# Altium PCB BLE_tag_hv2.PcbDoc
Units mm, origin at the board's own origin, x right, y up, seen from the top; angles counter-clockwise.
Board outline 48 x 58 mm, 2 copper layers (Top Layer, Bottom Layer); 33 components, 27 nets, 122 pads, 195 vias.
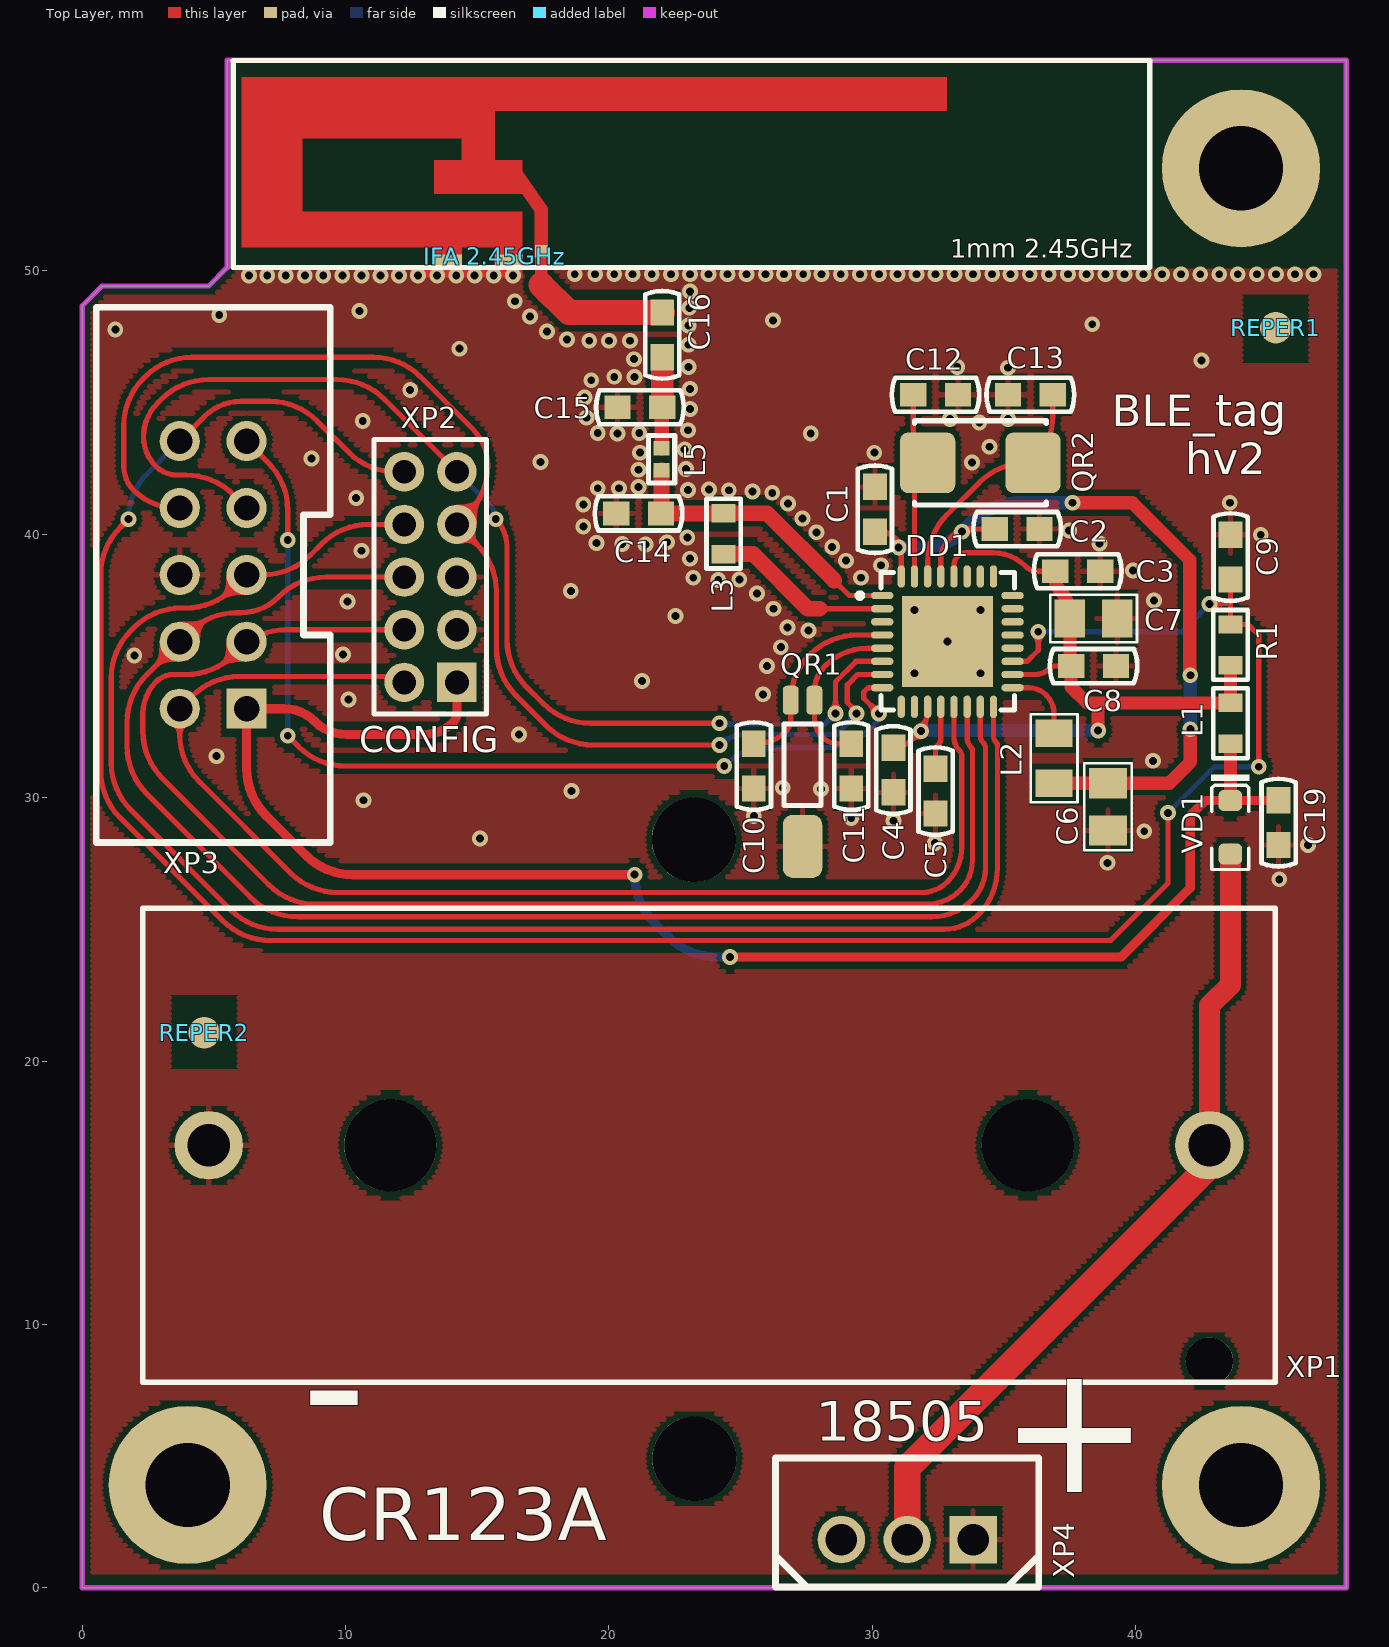
[diagram p0: Top Layer view]
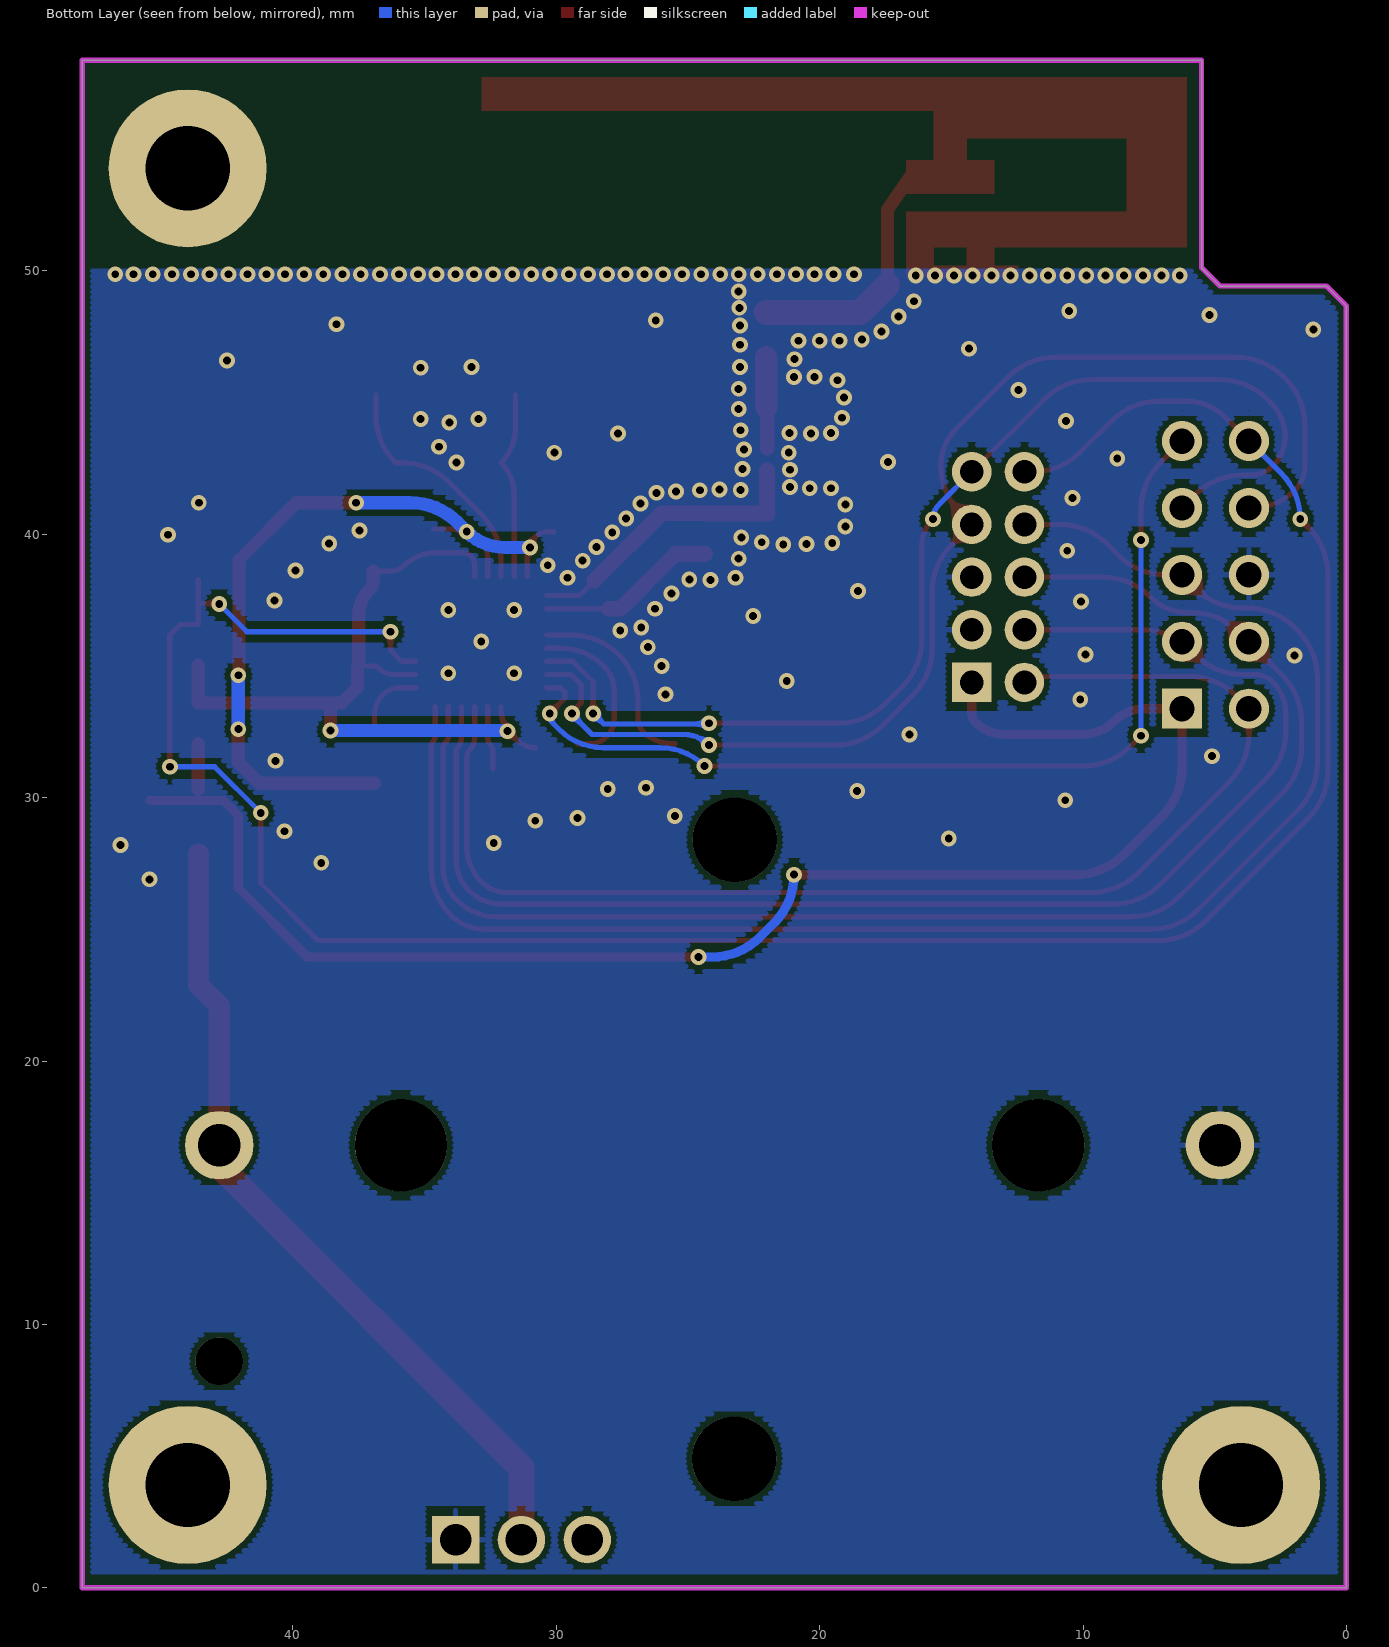
[diagram p1: Bottom Layer view, seen from below]
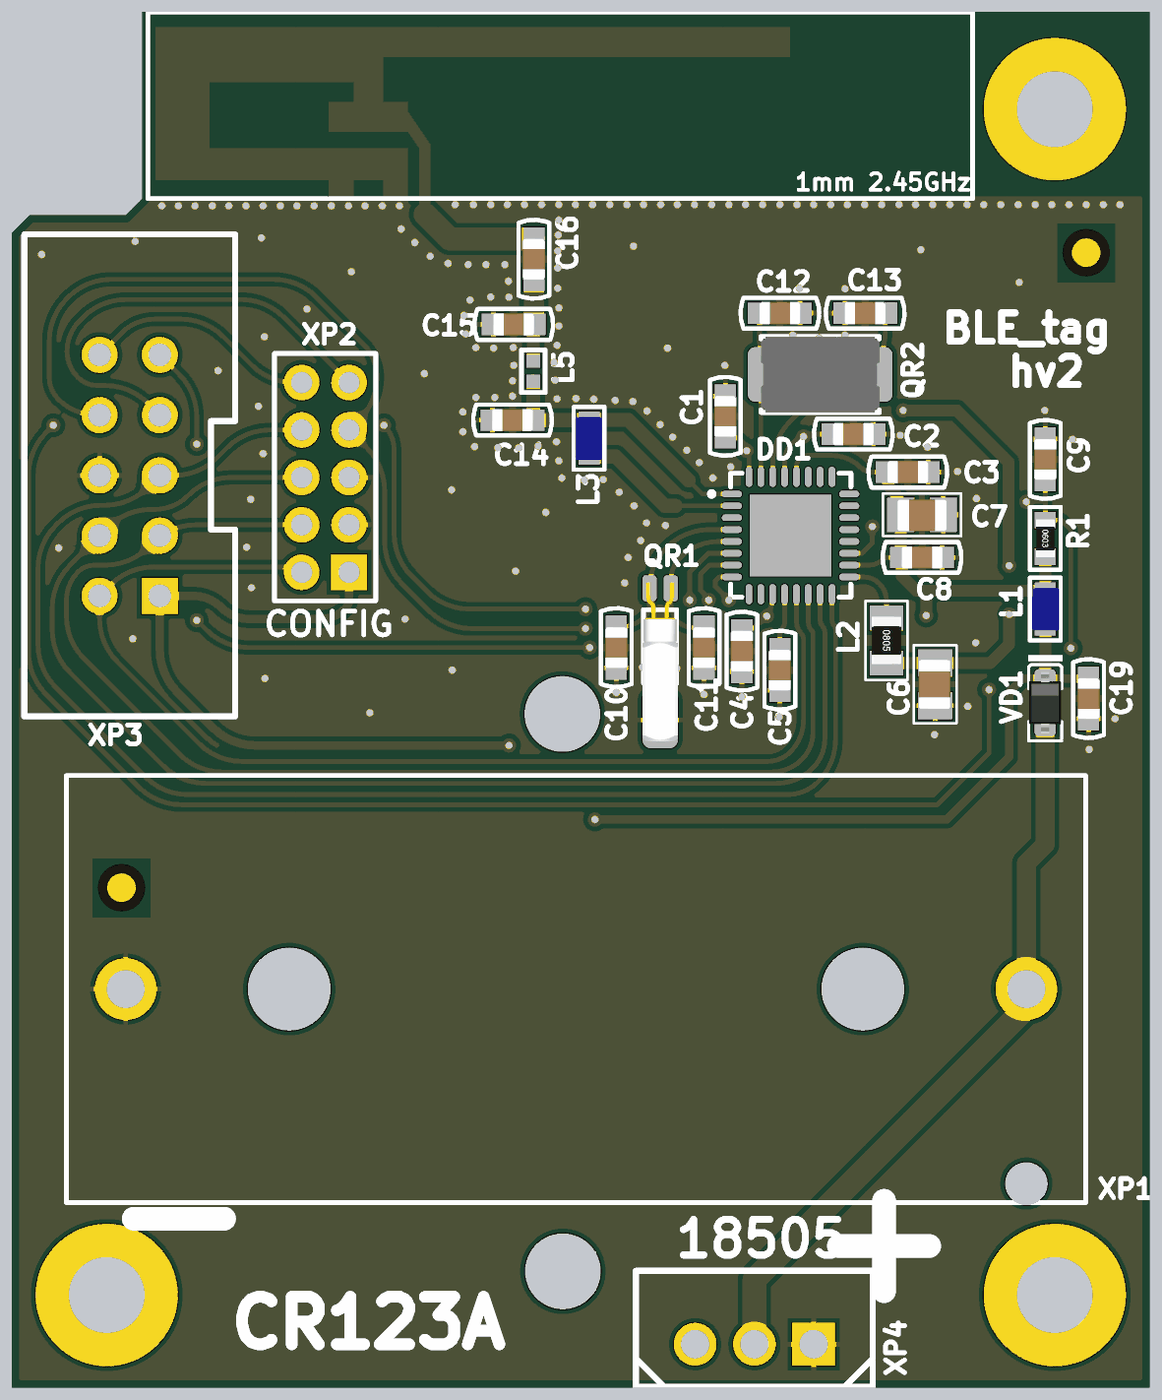
[diagram p2: 3D render of the assembled board from above, using the file's embedded part models]

## Layer stack, top to bottom
Top Solder: solder mask 0.0102, Solder Resist, Dk 3.5
Top Layer: signal copper 0.0356
Dielectric 1: dielectric 0.32, FR-4, Dk 4.8
Bottom Layer: signal copper 0.0356
Bottom Solder: solder mask 0.0102, Solder Resist, Dk 3.5

## Board outline
0,0 0,48.675 0.75,49.425 4.8,49.425 5.5,50.125 5.5,58 48,58 48,0

## Design rules (kind name [scope] priority, off if disabled: settings)
Clearance [All] p1: gap=0.2 ignorepadtopadclearanceinfootprint=FALSE
ComponentClearance [All] p1: gap=0.05 collisioncheckmode=3 verticalgap=2540 showdistances=FALSE
HoleSize [All] p1: absolutevalues=TRUE maxlimit=10 minlimit=0.025 maxpercent=80.000 minpercent=20.000
HoleToHoleClearance [All] p1: gap=0.05 allowstackedmicrovias=TRUE
MinimumSolderMaskSliver [All] p1: minsoldermaskwidth=0.05
PolygonConnect VIA [IsVia] p1: connectstyle=Direct reliefconductorwidth=0.254 reliefentries=4 polygonreliefangle="90 Angle" airgapwidth=0.254
PolygonConnect [All] p2: connectstyle=Relief reliefconductorwidth=0.2 reliefentries=4 polygonreliefangle="90 Angle" airgapwidth=0.2
RoutingVias [All] p1: holewidth=0.4 width=0.8 viastyle="Through Hole" minholewidth=0.3 minwidth=0.6 maxholewidth=0.5 maxwidth=1
ShortCircuit Antenna [InComponent('ANT1')] p1: allowed=TRUE
ShortCircuit [All] p2: allowed=FALSE
SilkToSilkClearance [All] p1: silktosilkclearance=0.05
SilkToSolderMaskClearance [IsPad] p1: minsilkscreentomaskgap=0.05 clearancetoexposedcopper=TRUE
SolderMaskExpansion [All] p1: expansion=0.102
Width [All] p1: maxlimit=3 minlimit=0.2 preferedwidth=0.5
23 further rules are at their usual default settings.

## Classes and differential pairs
component class [5]-CONNECTORS: C19 VD1 XP1 XP2 XP3 XP4
component class [4]-RF: C14 C15 C16 "IFA 2.45GHz" L3 L5 REPER1 REPER2
component class [3]-MCU: C1 C2 C3 C4 C5 C6 C7 C8 C9 C10 C11 C12 C13 DD1 L1 L2 QR1 QR2 R1

## Components (designator, comment, footprint, x,y, rotation, side; value= is the part's Value field where it differs from the comment)
C1 "0.1uF" CC0603 30.1,40.95 r90 top
C2 "0.1uF" CC0603 35.5,40.2 r0 top
C3 "0.1uF" CC0603 37.8,38.6 r180 top
C4 "0.1uF" CC0603 30.8,31.05 r90 top
C5 "1uF" CC0603 32.4,30.25 r270 top
C6 "10uF" CC0805 38.95,29.65 r90 top
C7 "10uF" CC0805 38.4,36.8 r180 top
C8 "0.1uF" CC0603 38.4,35 r180 top
C9 "0.1uF" CC0603 43.6,39.134 r270 top
C10 "15pF" CC0603 25.5,31.2 r270 top
C11 "15pF" CC0603 29.2,31.2 r270 top
C12 "22pF" CC0603 32.4,45.298 r0 top
C13 "22pF" CC0603 36,45.3 r180 top
C14 "1.2pF" CC0603 21.122,40.79 r0 top
C15 "1.2pF" CC0603 21.172,44.825 r0 top
C16 "12pF" CC0603 22.025,47.575 r90 top
C19 "0.1uF" CC0603 45.425,29.05 r90 top
DD1 "CC2650" QFN32_TI 30.375,37.675 r0 top
"IFA 2.45GHz" "ANTENNA_IFA_245_1MM" IFA245_1mm 13.331,44.294 r0 top value="IFA 2.45GHz" (schematic designator =Value)
L1 "BLM18HE152SN1" L0603 43.6,32.825 r90 top
L2 "10uH" RC0805 36.9,31.5 r270 top
L3 "L0603" L0603 24.35,40.025 r270 top value=15nH
L5 "2nH" L0402 21.997,42.85 r90 top
QR1 "MS3V-T1R" MS3V-T1R 27.8,33.7 r270 top
QR2 "SJK-6L-24.0" AC5032_2 34.1,42.715 r0 top
R1 "100k" RC0603 43.6,35.8 r270 top
REPER1 "REPER1.2" REPER1.2 45.325,47.85 r90 top
REPER2 "REPER1.2" REPER1.2 4.625,21.075 r90 top
VD1 "PMEG1020EJ" SOD323 43.593,28.875 r90 top
XP1 "BHC-CR123A" CR123_HOLDER 42.8,16.8 r180 top locked
XP2 "PLD2-10" PLD2-10 14.2,34.375 r180 top
XP3 "BH-10" BH-10 6.24,33.38 r90 top locked
XP4 "MW03D" MW03D 33.825,1.825 r180 top

## Footprints (in the part's own frame and the unit in brackets; to place one, negate y for a bottom-side part, rotate by r counter-clockwise, add the part's x,y. Pads: shape width x height; smd on the part's side, far side on the other; paste and mask are expansions set on the pad)
AC5032_2 [mm]
  rrect30% 2.1x2.3 smd mask+0.05: 1(-2,0) 2(2,0)
  silkscreen extent -2.5,-1.6 2.5,1.6, body extent -2.5,-1.6 2.5,1.6, height 1.2
BH-10 [mil] "Connector; Header; 5x2 Position"
  rect 60x60 hole 38 mask+1.97: 1(0,0)
  round 60 hole 38 mask+1.97: 2(0,100) 3(100,0) 4(100,100) 5(200,0) 6(200,100) 7(300,0) 8(300,100) 9(400,0) 10(400,100)
  silkscreen extent -200,-125 600,225
CC0603 [mm]
  rect 1x0.9 smd paste-25.4 mask+0.05: 1(-0.85,0) 2(0.85,0)
  silkscreen extent -1.66,-0.65 1.66,0.65, body extent -0.87,-0.47 0.88,0.48, height 0.85
CC0805 [mm]
  rect 1.15x1.45 smd paste-25.4 mask+0.05: 1(-0.9,0) 2(0.9,0)
  silkscreen extent -1.65,-0.9 1.65,0.9, body extent -1.05,-0.65 1.05,0.7, height 1.1
CR123_HOLDER [mm]
  round 1.8 hole 1.8 unplated mask+0.05: 0(0,8.2)
  round 3.5 hole 3.5 unplated mask+0.05: 0(6.9,0) 0(31.1,0)
  round 2.6 hole 1.6 mask+0.05: 1(0,0) 2(38,0)
  silkscreen extent -2.5,-9 40.5,9, body extent -2.5,-9 40.5,9, height 14
IFA245_1mm [mm]
  rect 0.48x0.48 smd paste-2 mask+0.05: 1(4.094,6.459)
  rect 1.046x0.5 smd paste-2 mask+0.05: 2(0.558,6.081) 2(2.86,6.081)
  Top Layer region: 19.497,13.06 19.496,13.061 -7.268,13.061 -7.268,6.606 0.035,6.606 0.035,5.831 1.081,5.831 1.081,6.605 2.337,6.605 2.337,5.831 3.383,5.831 3.383,7.955 3.382,7.956 -4.987,7.956 -4.987,10.748 -4.986,10.749 1.082,10.749 1.081,10.748 1.081,9.912 0.035,9.912 0.035,8.647 3.38,8.647 3.382,8.645 3.854,7.956 3.854,6.22 4.335,6.219 4.335,8.104 3.383,9.502 3.383,9.911 2.338,9.912 2.336,9.912 2.337,11.097 2.337,11.795 19.496,11.796
  silkscreen extent -7.6,5.83 27.2,13.7
L0402 [mm]
  rect 0.55x0.6 smd mask+0.05: 1(-0.425,0) 2(0.425,0)
  silkscreen extent -0.9,-0.5 0.9,0.5
L0603 [mm]
  rect 0.7x0.9 smd paste-25.4 mask+0.05: 1(-0.775,0) 2(0.774,0)
  silkscreen extent -1.32,-0.65 1.33,0.65, body extent -0.9,-0.58 0.9,0.54, height 1
MS3V-T1R [mm]
  rrect50% 1.1x0.6 smd mask+0.05: 1(0,0) 2(0,-0.9)
  rrect50% 2.4x1.5 smd mask+0.05: 3(5.55,-0.45)
  silkscreen extent 0.9,-1.15 4,0.25, body extent -0.25,-1.19 6.45,0.29, height 1.48
MW03D [mm]
  rect 1.8x1.8 hole 1.2 mask+0.05: 1(0,0)
  round 1.8 hole 1.2 mask+0.05: 2(2.5,0) 3(5,0)
  silkscreen extent -2.5,-3.1 7.5,1.8
PLD2-10 [mm]
  rect 1.5x1.5 hole 0.9 mask+0.05: 1(-0.025,0)
  round 1.5 hole 0.9 mask+0.05: 2(1.975,0) 3(-0.025,-2) 4(1.975,-2) 5(-0.025,-4) 6(1.975,-4) 7(-0.025,-6) 8(1.975,-6) 9(-0.025,-8) 10(1.975,-8)
  silkscreen extent -1.15,-9.23 3.13,1.2
QFN32_TI [mm]
  oval 0.85x0.28 smd mask+0.05: 1(0,0) 2(0,-0.5) 3(0,-1) 4(0,-1.5) 5(0,-2) 6(0,-2.5) 7(0,-3) 8(0,-3.5) 17(4.95,-3.5) 18(4.95,-3) 19(4.95,-2.5) 20(4.95,-2) 21(4.95,-1.5) 22(4.95,-1) 23(4.95,-0.5) 24(4.95,0)
  oval 0.28x0.85 smd mask+0.05: 9(0.725,-4.225) 10(1.225,-4.225) 11(1.725,-4.225) 12(2.225,-4.225) 13(2.725,-4.225) 14(3.225,-4.225) 15(3.725,-4.225) 16(4.225,-4.225) 25(4.225,0.725) 26(3.725,0.725) 27(3.225,0.725) 28(2.725,0.725) 29(2.225,0.725) 30(1.725,0.725) 31(1.225,0.725) 32(0.725,0.725)
  rect 3.45x3.45 smd mask+0.05: 33(2.475,-1.75)
  silkscreen extent -0.95,-4.35 5.02,0.87
RC0603 [mm]
  rect 0.7x0.9 smd paste-25.4 mask+0.05: 1(-0.775,0) 2(0.774,0)
  silkscreen extent -1.32,-0.65 1.33,0.65, body extent -0.8,-0.4 0.8,0.4, height 0.45
RC0805 [mm]
  rect 1.05x1.4 smd paste-25.4 mask+0.05: 1(-0.95,0) 2(0.95,0)
  silkscreen extent -1.67,-0.89 1.67,0.89, body extent -1,-0.62 1,0.63, height 0.6
REPER1.2 [mm]
  round 1.2 smd paste-25.4 mask+0.05: 1(0,0)
  Top Layer pour cut-out: -1.35,-1.325 1.325,-1.325 1.325,1.325 -1.35,1.325
SOD323 [mm]
  rrect50% 0.8x0.9 smd mask+0.05: 1(-1.016,0) 2(1.016,0)
  silkscreen extent -1.6,-0.74 2,0.72, body extent -1.3,-0.67 1.3,0.67, height 1.1

## Part data
C1 C2 C3 C4 C5 C8 C9 C10 C11 C12 C13 C14 C15 C16 C19: library part CC0603, "CC0603"
C6 C7: library part CC0805, "CC0805"
DD1: library part CC2650RHB, "CC2650RHBT"
"IFA 2.45GHz": "Antenna 2.45GHz"
L1: library part L0603, "L0603"
L2: library part L0805, "L0805"
L5: library part L0402, "L0402"
QR1: "CRYSTAL_32768 Hz"
QR2: library part AC5032_2, "AC5032/2"
R1: library part RC0603, "RC0603"
VD1: library part PMEG2010
XP1: "Holder for CR123 battery"

## Free pads (board coordinates)
  round 6 hole 3.2 unplated mask+0.05: 0(4,3.9) 0(44,3.9) 0(44,53.9)
  round 3.2 hole 3.2 unplated mask+0.05: 0(23.225,28.4) 0(23.246,4.9)

## Via types
v1: diameter 0.6, hole 0.3, Top Layer to Bottom Layer, tented both sides, 195 vias

## Nets (pads, with @x,y where several pads share a name; then routed paths per layer and width w, separated by ;. In a path a pad name is that pad's centre, name@x,y a point inside that pad or via, vN(x,y) a via of type N, cw(c..) or ccw(c..) an arc to the next point about the centre after c; other vN are vias at no path point)
+3V: C19.2 L1.1 VD1.2 XP2.1 XP3.1 | length 60.8
  Top Layer w0.35: XP2.1 14.225,33.212 cw(c13.713,33.212) 14.075,32.85 cw(c12.989,33.936) 12.989,32.4 10.032,32.4 cw(c10.032,34.107) 8.825,32.9 ccw(c7.666,31.741) 7.666,33.38 XP3.1 6.24,31.112 ccw(c8.78,31.112) 6.984,29.316 8.481,27.819 ccw(c10.277,29.615) 10.277,27.075 v1(20.975,27.075) ; v1(24.6,23.95) 39.45,23.95 42.075,26.575 42.075,29.325 42.641,29.891 VD1.2 45.416,29.891 C19.2
  Top Layer w0.5: 43.6,30.307 L1.1
  Bottom Layer w0.35: v1(20.975,27.075) 20.975,27.052 ccw(c23.515,27.052) 21.719,25.256 22.281,24.694 ccw(c24.077,26.49) 24.077,23.95 v1(24.6,23.95)
+3V_F: C3.2 C4.2 C7.2 C8.2 DD1.11 DD1.18 DD1.28 L1.2 R1.2 | length 29.3
  Top Layer w0.2: C4.2 ccw(c30.8,32.866) 31.483,32.183 31.7,32.4 ccw(c30.734,33.366) 32.1,33.366 DD1.11 ; DD1.28 33.1,38.814 cw(c33.612,38.814) 33.25,39.176 cw(c33.55,38.876) 33.55,39.3 34.593,39.3 cw(c34.593,37.593) 35.8,38.8 ccw(c36.283,39.283) 36.283,38.6 C3.2 ; DD1.18 36.176,34.675 ccw(c36.176,35.443) 36.719,34.9 cw(c36.96,34.659) 36.96,35 C8.2
  Top Layer w0.5: C3.2 36.95,38.262 ccw(c37.462,38.262) 37.1,37.9 cw(c36.134,36.934) 37.5,36.934 C7.2 37.5,35.121 ccw(c37.671,35.121) C8.2 37.55,34.2 38.151,33.599 38.6,33.599 ; v1(38.575,32.55) 38.575,33.574 38.6,33.599 ; R1.2 L1.2 38.6,33.599
  Bottom Layer w0.5: v1@31.851,32.55 v1(38.575,32.55)
  other v1: 31.851,32.525
BT_MRDO: DD1.8 XP3.9 | length 37.4
  Top Layer w0.2: XP3.9 7.056,42.724 cw(c5.26,40.928) 7.8,40.928 v1(7.8,39.779) ; v1(7.8,32.35) 8.206,31.944 ccw(c10.002,33.74) 10.002,31.2 v1(24.375,31.2) ; v1(30.249,33.2) 29.675,33.774 29.675,34.009 29.841,34.175 DD1.8
  Bottom Layer w0.2: v1(7.8,32.35) v1(7.8,39.779) ; v1(24.375,31.2) cw(c26.065,29.51) 26.065,31.9 28.225,31.9 ccw(c28.225,34.254) 29.889,32.589 30.071,32.771 ccw(c29.641,33.2) v1(30.249,33.2) ; v1(7.8,39.779) cw(c7.971,39.779) 7.85,39.9 7.8,39.85 v1(7.8,39.779)
BT_RX: DD1.7 XP2.7 XP3.8 | length 48.4
  Top Layer w0.2: XP3.8 3.58,41 cw(c3.58,43.305) 1.95,41.675 cw(c2.855,42.58) 1.575,42.58 1.575,44.123 cw(c4.115,44.123) 2.319,45.919 2.381,45.981 cw(c4.177,44.185) 4.177,46.725 11.048,46.725 cw(c11.048,44.185) 12.844,45.981 14.817,44.008 cw(c13.408,42.6) 15.4,42.6 cw(c12.865,42.6) 14.658,40.808 XP2.7 14.981,39.619 cw(c13.185,37.823) 15.725,37.823 15.725,35.677 ccw(c18.265,35.677) 16.469,33.881 17.606,32.744 ccw(c19.402,34.54) 19.402,32 v1(24.2,32) ; v1(29.4,33.2) 29.447,33.2 29.2,33.447 29.2,33.47 29.05,33.62 29.05,34.284 29.441,34.675 DD1.7
  Bottom Layer w0.2: v1(24.2,32) cw(c25.166,31.034) 25.166,32.4 28.649,32.4 29.4,33.151 v1(29.4,33.2)
BT_TX: DD1.6 XP2.9 XP3.7 | length 44.9
  Top Layer w0.2: XP3.7 5.734,41.506 ccw(c3.938,39.71) 3.938,42.25 3.606,42.25 cw(c3.606,43.412) 2.785,42.59 cw(c3.894,43.7) 2.325,43.7 cw(c4.136,43.7) 2.855,44.98 3.006,45.131 cw(c4.802,43.335) 4.802,45.875 9.673,45.875 cw(c9.673,43.335) 11.469,45.131 XP2.9 ; v1(15.7,40.575) cw(c14.674,39.549) 16.125,39.549 16.125,36.002 ccw(c18.665,36.002) 16.869,34.206 17.507,33.568 ccw(c19.303,35.364) 19.303,32.824 v1(24.2,32.824) ; v1(28.6,33.2) 28.6,34.4 29.375,35.175 DD1.6
  Bottom Layer w0.2: XP3.7@5.834,41.406 XP3.7 ; XP2.9 15.47,41.13 cw(c14.915,40.575) v1(15.7,40.575) ; v1@24.2,32.8 28.2,32.8 v1(28.6,33.2)
GND: "IFA 2.45GHz.2" C1.2 C2.2 C3.1 C4.1 C5.2 C6.1 C7.1 C8.1 C9.1 C10.2 C11.2 C12.2 C13.2 C14.1 C15.1 C19.1 DD1.33 QR1.3 XP1.2 XP2.3 XP2.5 XP3.6 XP4.1
  other v1: 45.45,26.9 38.925,27.525 46.546,28.2 32.375,28.275 15.1,28.45 40.325,28.725 30.8,29.125 29.2,29.225 25.5,29.3 10.675,29.9 18.575,30.25 28.049,30.325 26.6,30.375 40.661,31.4 5.1,31.575 16.584,32.4 10.106,33.725 25.85,33.925 21.25,34.425 31.6,34.725 34.1,34.725 26,35 1.975,35.4 9.9,35.431 26.525,35.714 32.85,35.925 27.574,36.35 26.775,36.456 22.525,36.9 31.6,37.125 34.1,37.125 26.25,37.175 10.075,37.45 40.697,37.484 25.625,37.75 18.55,37.85 24.15,38.262 24.95,38.284 23.2,38.35 29.575,38.35 39.9,38.625 30.325,38.825 29,39 23.075,39.076 10.6,39.375 28.475,39.518 21.384,39.619 20.5,39.631 38.625,39.65 19.522,39.675 22.2,39.7 22.975,39.875 44.75,39.984 27.875,40.075 37.475,40.15 19.025,40.3 27.348,40.601 19.025,41.136 26.8,41.175 43.575,41.2 10.4,41.375 26.2,41.575 25.45,41.625 24.55,41.675 23,41.688 23.8,41.7 19.575,41.75 20.375,41.75 21.122,41.8 21.122,42.45 22.925,42.475 33.786,42.725 17.4,42.75 8.7,42.875 21.175,43.1 30.075,43.1 22.875,43.225 34.45,43.325 20.325,43.825 27.663,43.825 19.572,43.85 21.15,43.85 23,43.95 34.063,44.25 10.65,44.306 32.95,44.375 35.15,44.375 19.15,44.425 23.075,44.757 19.075,45.2 12.45,45.475 23.075,45.525 19.325,45.85 20.2,45.981 20.972,45.975 35.15,46.325 23.025,46.35 33.225,46.35 42.5,46.6 20.95,46.65 14.325,47.05 23.025,47.2 19.25,47.35 20,47.35 20.8,47.35 18.4,47.4 17.65,47.7 1.254,47.775 23.025,47.925 38.35,47.975 26.225,48.125 17,48.275 5.2,48.325 10.525,48.475 23.05,48.6 16.425,48.85 23.075,49.225 6.325,49.825 7.025,49.825 7.725,49.825 8.45,49.825 9.15,49.825 9.875,49.825 10.6,49.825 11.325,49.825 12.025,49.825 12.75,49.825 13.475,49.825 14.2,49.825 14.9,49.825 15.625,49.825 16.35,49.825 18.7,49.875 19.475,49.875 20.2,49.875 20.9,49.875 21.625,49.875 22.35,49.875 23.075,49.875 23.775,49.875 24.5,49.875 25.225,49.875 25.95,49.875 26.65,49.875 27.375,49.875 28.075,49.875 28.8,49.875 29.525,49.875 30.25,49.875 30.95,49.875 31.675,49.875 32.4,49.875 33.125,49.875 33.825,49.875 34.55,49.875 35.25,49.875 35.975,49.875 36.7,49.875 37.425,49.875 38.125,49.875 38.85,49.875 39.575,49.875 40.3,49.875 41,49.875 41.725,49.875 42.45,49.875 43.175,49.875 43.875,49.875 44.6,49.875 45.325,49.875 46.05,49.875 46.75,49.875
JTAG_TCK: DD1.14 XP2.4 XP3.3 | length 53.8
  Top Layer w0.2: XP3.3 XP3.3@5.951,35.631 ; XP2.4 7.747,36.375 ccw(c7.747,33.835) XP3.3@5.951,35.631 ; DD1.14 33.6,32.279 ccw(c34.136,32.279) 33.757,31.9 cw(c33.653,31.796) 33.8,31.796 33.8,27.622 cw(c32.178,27.622) 33.325,26.475 cw(c32.058,27.742) 32.058,25.95 8.877,25.95 cw(c8.877,28.49) 7.081,26.694 3.044,30.731 cw(c4.84,32.527) 2.3,32.527 2.3,33.193 cw(c4.007,33.193) 2.8,34.4 cw(c3.464,33.736) 3.464,34.675 3.943,34.675 ccw(c3.943,37.215) 5.739,35.419 5.855,35.535 XP3.3@5.951,35.631
JTAG_TDI: DD1.16 XP2.8 XP3.5 | length 61.1
  Top Layer w0.2: XP2.8 10.877,40.375 ccw(c10.877,37.835) 9.081,39.631 8.654,39.204 cw(c6.858,41) 6.858,38.46 XP3.5 5.724,37.944 cw(c3.928,39.74) 3.928,37.2 3.752,37.2 ccw(c3.752,34.66) 1.956,36.456 1.844,36.344 ccw(c3.64,34.548) 1.1,34.548 1.1,31.327 ccw(c3.64,31.327) 1.844,29.531 5.631,25.744 ccw(c7.427,27.54) 7.427,25 32.725,25 ccw(c32.725,26.812) 34.006,25.531 ccw(c32.21,27.327) 34.75,27.327 34.75,31.988 ccw(c34.588,31.988) 34.702,32.102 cw(c34.95,32.35) 34.6,32.35 DD1.16
JTAG_TDO: DD1.15 XP2.6 XP3.4 | length 56.8
  Top Layer w0.2: XP2.6 9.252,38.375 ccw(c9.252,35.835) 7.456,37.631 7.433,37.608 cw(c6.025,39.017) 6.025,37.025 5.857,37.025 ccw(c5.857,34.485) 4.061,36.281 XP3.4 2.444,34.664 ccw(c4.24,32.868) 1.7,32.868 1.7,31.952 ccw(c4.24,31.952) 2.444,30.156 6.381,26.219 ccw(c8.177,28.015) 8.177,25.475 32.251,25.475 ccw(c32.251,27.646) 33.786,26.111 ccw(c32.545,27.352) 34.3,27.352 34.3,31.859 ccw(c33.959,31.859) 34.2,32.1 cw(c34.441,32.341) 34.1,32.341 DD1.15
JTAG_TMS: DD1.13 XP2.2 XP3.2 | length 49
  Top Layer w0.2: XP2.2 ccw(c11.682,33.832) 11.682,34.6 5.972,34.6 ccw(c5.972,32.06) 4.176,33.856 XP3.2 3.7,32.402 ccw(c6.24,32.402) 4.444,30.606 7.906,27.144 ccw(c9.702,28.94) 9.702,26.4 31.878,26.4 ccw(c31.878,27.766) 32.844,26.8 ccw(c31.502,28.142) 33.4,28.142 33.4,31.559 ccw(c33.059,31.559) 33.3,31.8 cw(c33.783,32.283) 33.1,32.283 DD1.13
MISO: DD1.25
MOSI: DD1.24
NetC1_1: C1.1 C2.1 C6.2 DD1.29 DD1.32 L2.2 | length 31.3
  Top Layer w0.2: C1.1 30.317,40.1 cw(c30.317,39.417) 30.8,39.9 cw(c30.076,39.176) 31.1,39.176 DD1.32 ; DD1.29 32.6,39.076 cw(c33.624,39.076) 32.9,39.8 cw(c33.866,38.834) 33.866,40.2 C2.1
  Top Layer w0.5: L2.2 C6.2 41.275,30.55 42.075,31.35 v1(42.075,32.6) ; v1(37.6,41.2) 39.875,41.2 42.05,39.025 42.05,34.675 v1(42.075,34.65)
  Bottom Layer w0.5: v1(31,39.5) 31.951,39.5 ccw(c31.951,41.549) v1(33.4,40.1) 33.756,40.456 cw(c35.552,38.66) 35.552,41.2 v1(37.6,41.2) ; v1(42.075,32.6) v1(42.075,34.65)
NetC5_1: C5.1 DD1.12 | length 2.4
  Top Layer w0.2: C5.1 32.4,31.759 cw(c32.741,31.759) 32.5,32 ccw(c32.259,32.241) 32.6,32.241 DD1.12
NetC12_1: C12.1 DD1.31 QR2.1 | length 7.2
  Top Layer w0.2: C12.1 31.55,44.043 ccw(c33.428,44.043) QR2.1 ccw(c33.307,41.508) 31.6,41.508 DD1.31
NetC13_1: C13.1 DD1.30 QR2.2 | length 9.3
  Top Layer w0.2: DD1.30 32.1,38.956 cw(c34.64,38.956) 32.844,40.752 34.063,41.971 cw(c35.859,40.175) 35.859,42.715 QR2.2 36.106,42.721 ccw(c34.31,44.517) 36.85,44.517 C13.1
NetC15_2: C15.2 C16.1 L5.2 | length 3.5
  Top Layer w0.55: L5.2 21.997,44.8 C15.2
  Top Layer w0.85: C15.2 22.022,46.722 C16.1
NetC16_2: "IFA 2.45GHz.1" C16.2 | length 6.3
  Top Layer w0.48: 17.425,49.475 17.425,50.753
  Top Layer w0.96: 17.425,49.475 18.475,48.425 C16.2
NetDD1_17: DD1.17 L2.1 | length 2.9
  Top Layer w0.2: DD1.17 35.936,34.175 cw(c35.936,33.236) 36.6,33.9 cw(c35.876,33.176) 36.9,33.176 L2.1
NetVD1_1: VD1.1 XP1.1 XP4.2 | length 31.1
  Top Layer w0.8: XP1.1 42.8,22.1 43.593,22.893 VD1.1
  Top Layer w1: XP4.2 31.325,4.55 42.8,16.025 XP1.1
RESET: C9.2 DD1.19 R1.1 XP2.10 XP3.10 | length 92.6
  Top Layer w0.2: v1(1.75,40.575) 1.444,40.269 ccw(c3.24,38.473) 0.7,38.473 0.7,31.021 ccw(c3.24,31.021) 1.444,29.225 5.35,25.319 ccw(c7.146,27.115) 7.146,24.575 39.05,24.575 41.225,26.75 v1(41.225,29.425) ; XP3.10 4.634,44.474 cw(c6.025,43.082) 6.025,45.05 7.123,45.05 cw(c7.123,42.51) 8.919,44.306 10.106,43.119 ccw(c11.902,44.915) 11.902,42.375 XP2.10 ; DD1.19 35.875,35.175 36.3,35.6 v1(36.3,36.3) v1@36.1,36.3 ; v1(42.8,37.35) 42.825,37.375 43.6,37.375 ; C9.2 43.6,37.375 ; v1(44.675,31.175) 44.675,36.172 44.272,36.575 R1.1 43.6,37.375
  Bottom Layer w0.2: v1(1.75,40.575) cw(c4.2,40.575) 2.468,42.308 XP3.10 ; v1(36.3,36.3) 41.75,36.3 v1(42.8,37.35) ; v1(41.225,29.425) 42.975,31.175 v1(44.675,31.175)
RF_N: DD1.2 L3.2 | length 6.9
  Top Layer w0.2: 28,37.175 DD1.2
  Top Layer w0.6: L3.2 25.474,39.251 27.55,37.175 28,37.175
RF_P: C14.2 DD1.1 L3.1 L5.1 | length 11.3
  Top Layer w0.2: 28.55,38.25 29.125,37.675 DD1.1
  Top Layer w0.6: L5.1 21.997,40.815 C14.2 24.34,40.79 L3.1 26,40.8 28.55,38.25
SCK: DD1.23
SS0: DD1.22
X32K_Q1: C10.1 DD1.4 QR1.2 | length 7.4
  Top Layer w0.2: C10.1 25.614,32.05 ccw(c25.614,33.586) 26.7,32.5 ccw(c26.217,32.983) 26.9,32.983 QR1.2 cw(c29.314,33.7) 27.607,35.407 27.631,35.431 cw(c29.427,33.635) 29.427,36.175 DD1.4
X32K_Q2: C11.1 DD1.5 QR1.1 | length 6.4
  Top Layer w0.2: C11.1 28.704,32.05 cw(c28.704,32.904) 28.1,32.3 cw(c28.824,33.024) 27.8,33.024 QR1.1 27.8,34.034 cw(c29.166,34.034) 28.2,35 cw(c29.83,33.37) 29.83,35.675 DD1.5
pads on no net: DD1.3 DD1.9 DD1.10 DD1.20 DD1.21 DD1.26 DD1.27 REPER1.1 REPER2.1 XP1.0 XP4.3

## Polygon pours and split planes (outlines as drawn)
GND on Top Layer "GND_L01_P002" (hatched Horizontal grid 0.2 track 0.2, remove dead copper, pour order 2): 0,58 48,58 48,0 0,0
GND on Bottom Layer "GND_L02_P004" (hatched Horizontal grid 0.2 track 0.2, remove dead copper, pour order 4): 0,58 48,58 48,0 0,0

## Keep-outs
Keep-Out Layer:
  the board outline again, w0.2

## Other copper
Top Layer:
  rectangle net GND: 12.45,49.75 16.725,50.209
  pour cut-out: 5.724,58 5.724,50.125 48,50.125 48,58
Bottom Layer:
  pour cut-out: 5.75,58 5.75,50.125 48,50.125 48,58

## Silkscreen, mask and mechanical layers (free items; w line width, h text height)
Top Overlay:
  text "BLE_tag" at 39.1,44.1 h1.2
  text "hv2" at 41.875,42.275 h1.2
  text "CONFIG" at 10.525,31.725 h1
  text "18505" at 27.85,5.575 h1.5
  text "CR123A" at 9,1.8 h2

## Text inside footprints (layer, text, board x,y; h text height)
"IFA 2.45GHz": Top Overlay "1mm 2.45GHz" at 32.956,50.494 h0.7
XP1: Top Overlay "+" at 40.55,7.925 h5 r180; Top Overlay "-" at 10.8,9.075 h5 r180